# Altium PCB PCB1.PcbDoc
Units mil, origin at the board's own origin, x right, y up, seen from the top; angles counter-clockwise.
Board outline 3210.03 x 2220.03 mil, 2 copper layers (Top Layer, Bottom Layer); 14 components, 6 nets, 33 pads, 0 vias.
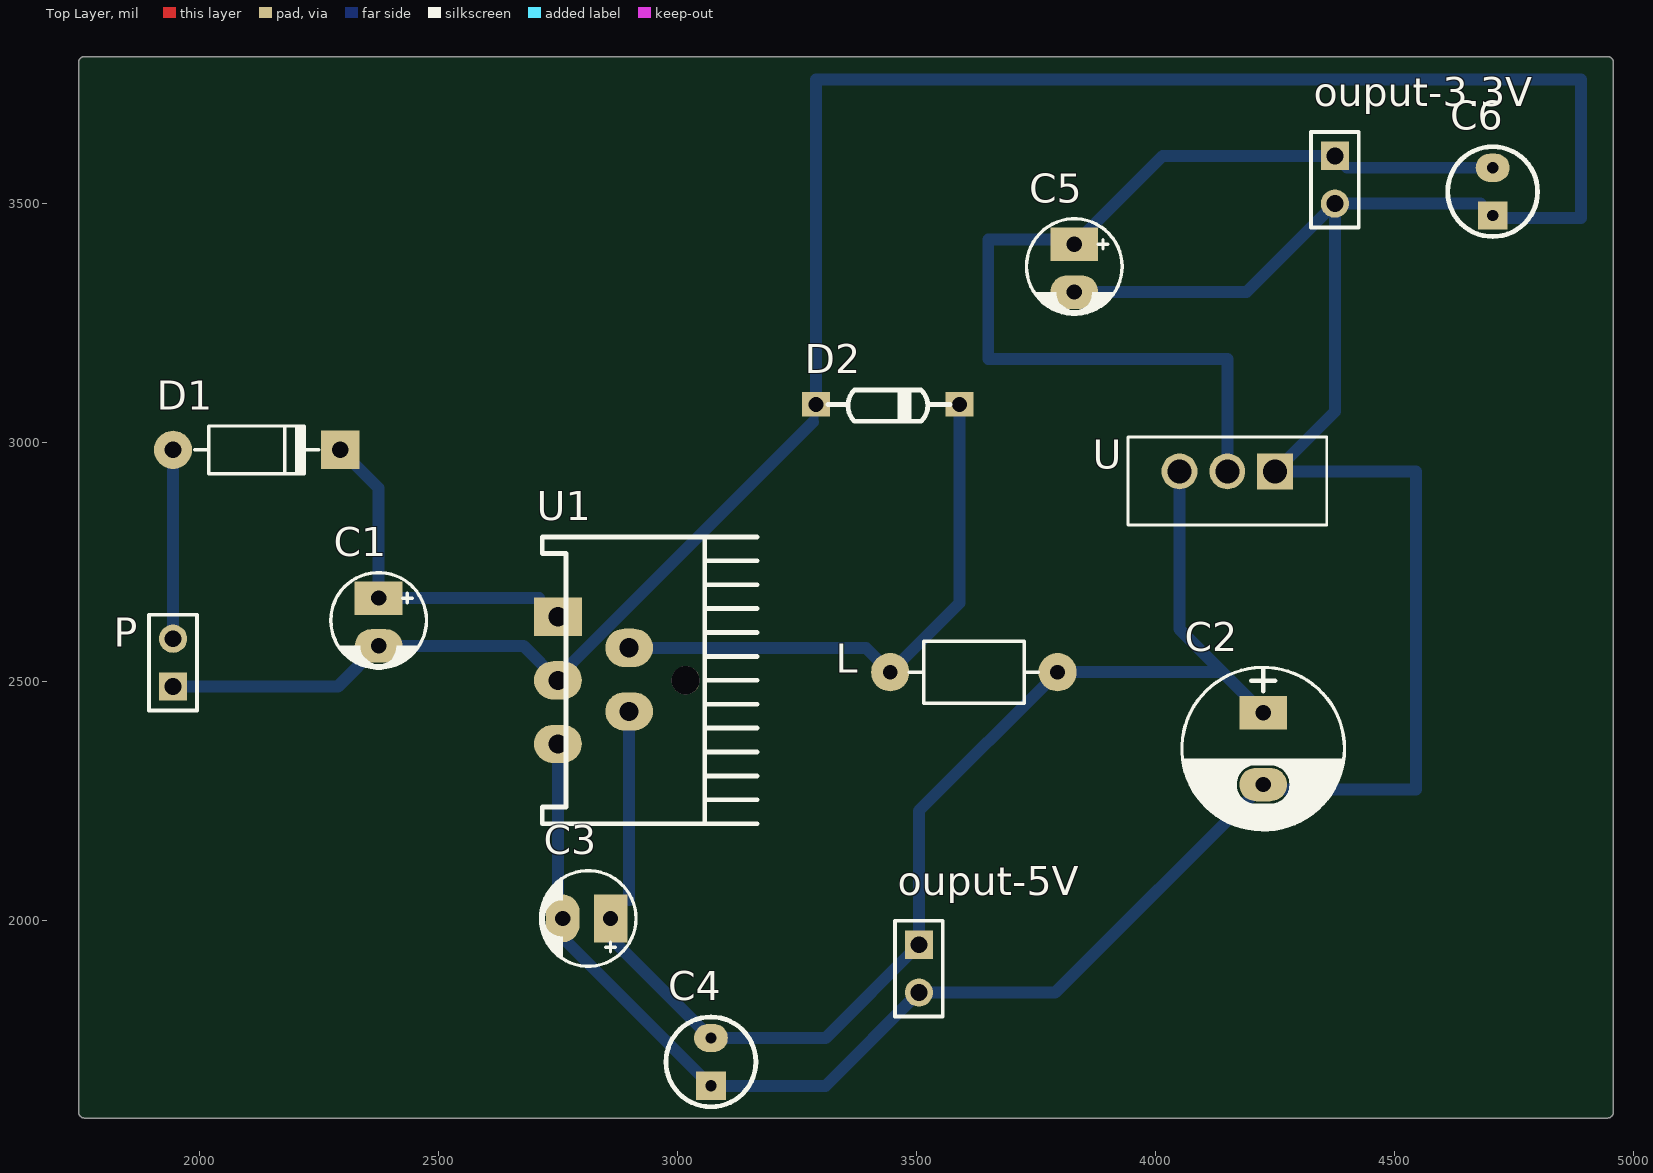
[diagram p0: Top Layer view]
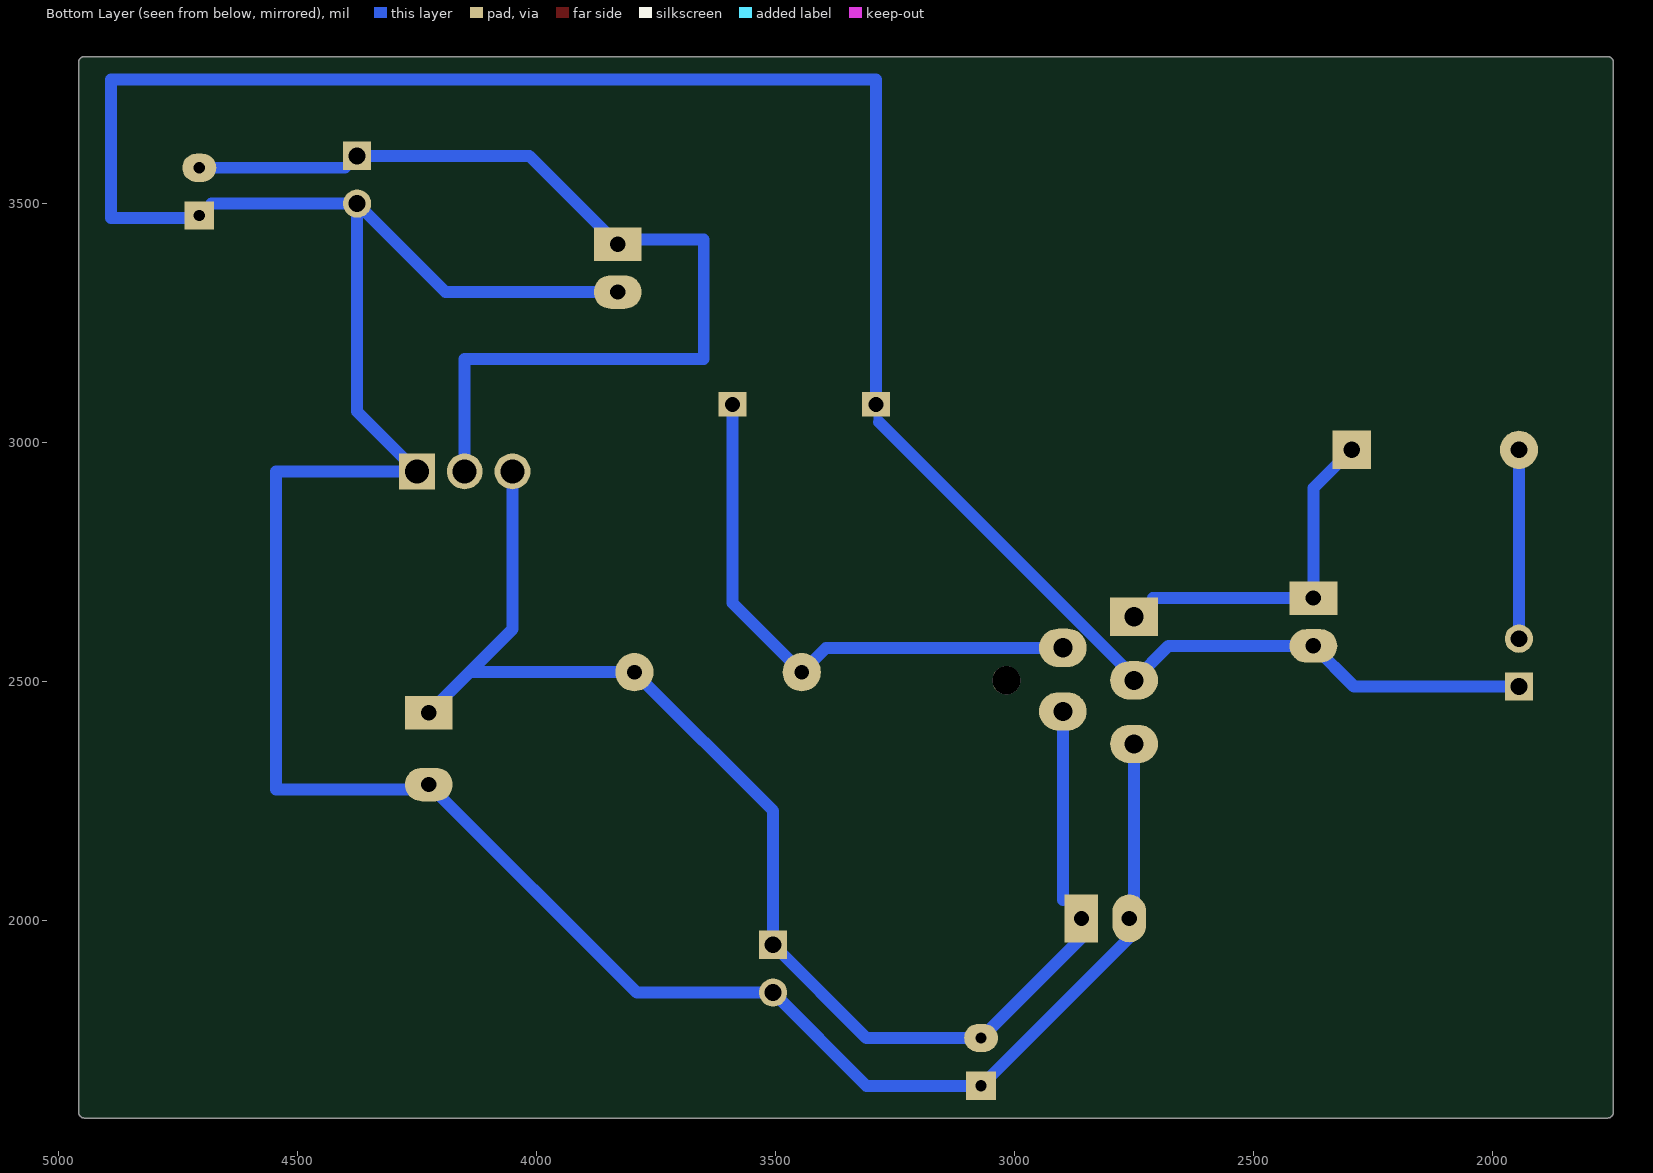
[diagram p1: Bottom Layer view, seen from below]
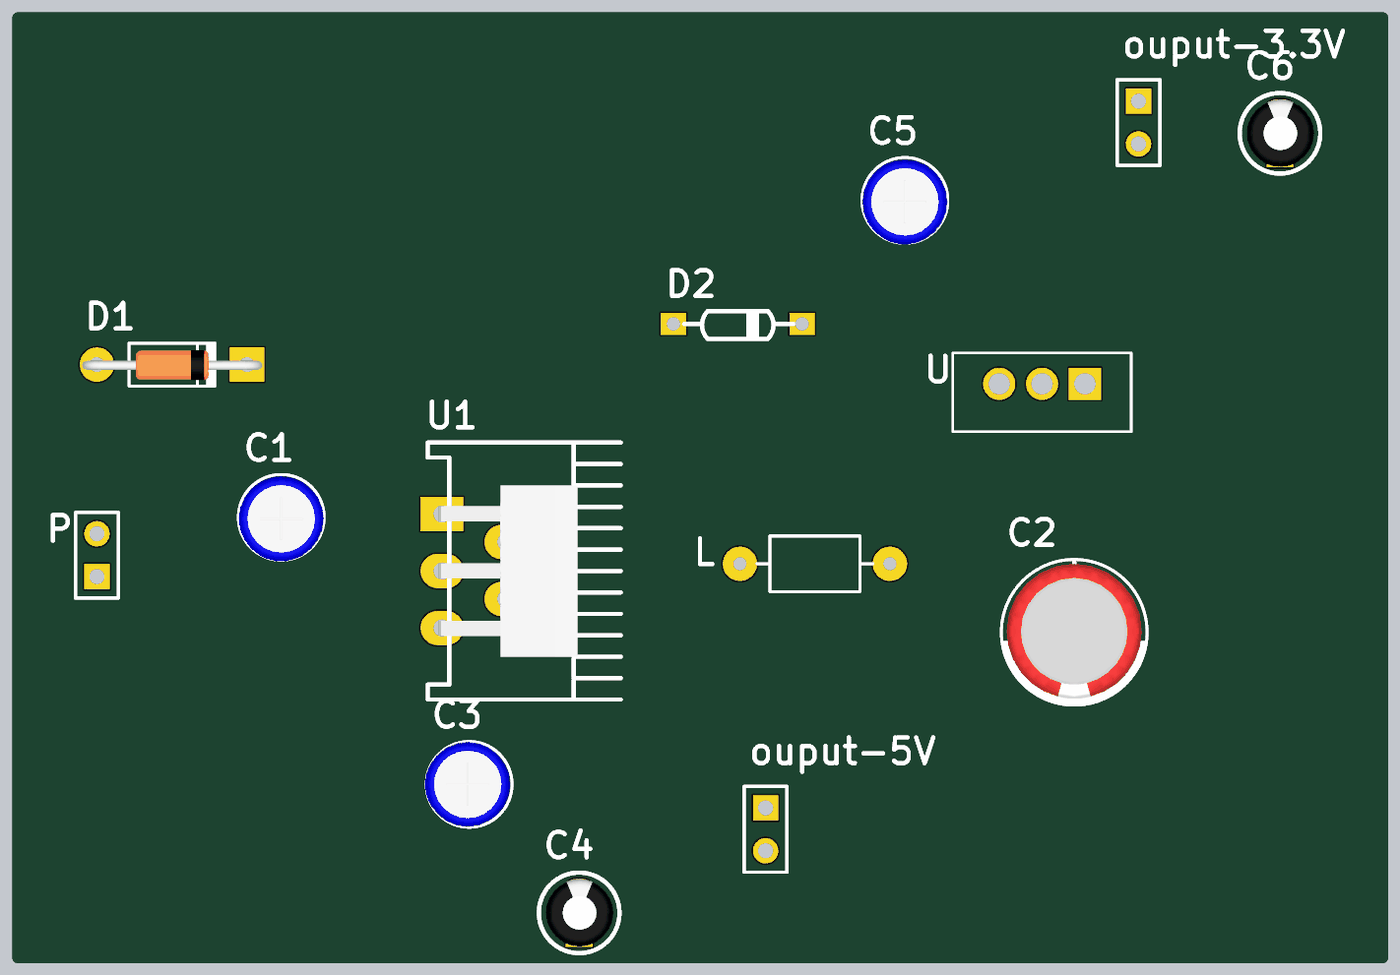
[diagram p2: 3D render of the assembled board from above, using the file's embedded part models]

## Layer stack, top to bottom
Top Solder: solder mask 0.4, Solder Resist, Dk 3.5
Top Layer: signal copper 1.4
Dielectric 1: dielectric 12.6, FR-4, Dk 4.8
Bottom Layer: signal copper 1.4
Bottom Solder: solder mask 0.4, Solder Resist, Dk 3.5

## Board outline
1747.49,1600 1747.48,3795 cw(c1760,3795) 1760,3807.51 4945,3807.51 cw(c4945,3795) 4957.51,3795 4957.52,1600 cw(c4945,1600) 4945,1587.48 1760,1587.48 cw(c1760,1600)

## Design rules (kind name [scope] priority, off if disabled: settings)
Clearance [All] p1: gap=10 ignorepadtopadclearanceinfootprint=FALSE except(0: Arc-Hole Track-Hole SMDPad-Hole THPad-Hole Via-Hole Fill-Hole Poly-Hole Region-Hole Text-Hole)
PolygonConnect [All] p1: connectstyle=Relief reliefconductorwidth=10 reliefentries=4 polygonreliefangle="90 Angle" airgapwidth=10
RoomDefinition Sheet1 [InComponentClass('Sheet1')] p1: confinementstyle=ConfineIn formatcopy=TRUE lockcomponents=FALSE outline 1785,165 5740,165 5740,890 1785,890
RoutingVias [All] p1: holewidth=28 width=50 viastyle="Through Hole" minholewidth=28 minwidth=50 maxholewidth=28 maxwidth=50
SolderMaskExpansion [All] p1: expansion=4
Width [All] p1: maxlimit=10 minlimit=10 preferedwidth=10
30 further rules are at their usual default settings.

## Components (designator, comment, footprint, x,y, rotation, side; value= is the part's Value field where it differs from the comment)
C1 "10uF" CP1/2 2375,2675 r270 top value=10uF/50V
C2 "330uF" CP1.5/3.4 4225,2435 r270 top value=100uF/35V/50V
C3 "10uF" CP1/2 2860,2005 r180 top value=10uF/50V
C4 "" C3MM 3070,1705 r90 top value=0.1uF
C5 "10uF" CP1/2 3830,3415 r270 top value=10uF/50V
C6 "" C3MM 4705,3525 r90 top value=0.1uF
D1 "1N4003" D1A 1945,2985 r180 top value=1N4007
D2 "1N5819" DIODE/NOM/0.5A 3290,3080 r0 top
L "330uH" L/0.4 3795,2520 r180 top value="150 mH"
ouput-3.3V "3.3V" HDR1X2 4375,3600 r270 top
ouput-5V "5V" HDR1X2 3505,1950 r270 top
P "Header 2" HDR1X2 1945,2490 r90 top
U "LM1117T-5.0" TO254P470X1016X2222-3P 4050,2900 r180 top
U1 "LM2576T-5.0" LM2576t 2917,2504 r270 top

## Footprints (in the part's own frame and the unit in brackets; to place one, negate y for a bottom-side part, rotate by r counter-clockwise, add the part's x,y. Pads: shape width x height; smd on the part's side, far side on the other; paste and mask are expansions set on the pad)
C3MM [mm]
  rect 1.5x1.58 hole 0.6: 1(-1.27,0)
  oval 1.5x1.8 hole 0.6: 2(1.27,0)
  silkscreen extent -2.39,-2.39 2.39,2.39, body extent -2,-2.03 1.99,1.97, height 7.01
CP1.5/3.4 [mil] "Tu hoa 220->470uF,16V, 470uF/16V,25V"
  rect 70x100 hole 32: 1(0,0)
  oval 70x100 hole 32: 2(150,0)
  silkscreen extent -95,-170 245,170, body extent -85,-157 230,157, height 446
CP1/2 [mil] "Tu hoa < 22uF/16>50V"
  rect 70x100 hole 32: 1(0,0)
  oval 70x100 hole 32: 2(100,0)
  silkscreen extent -53,-100 146,100, body extent -49,-99 149,99, height 287
D1A [mil] "Diode 1A, W 100mil, L 350mil"
  round 80 hole 35: 1(0,0)
  rect 80x80 hole 35: 2(-350,0)
  silkscreen extent -305,-50 -45,50, body extent -386,-33 34,36, height 84
DIODE/NOM/0.5A [mm]
  rect 1.5x1.3 hole 0.8: 1(0,0) 2(7.62,0)
  silkscreen extent 0.64,-0.89 7.11,0.76
HDR1X2 [mm] "Connector; Header; 2 Position"
  rect 1.5x1.5 hole 0.9: 1(0,0)
  round 1.5 hole 0.9: 2(2.54,0)
  silkscreen extent -1.27,-1.27 3.81,1.27, body extent -1.27,-1.27 3.81,1.27, height 7
L/0.4 [mil] "Inductor , 2 Pin, L 350mil, W 150 mil"
  round 80 hole 31: 1(0,0) 2(350,0)
  silkscreen extent 40,-65 310,65
LM2576t [mil]
  rect 80x100 hole 40: 1(-132,-167.09)
  oval 80x100 hole 40: 2(-67,-18) 3(1,-167) 4(66,-18) 5(134,-167)
  round 59.06 hole 59.06: ""(1,100)
  silkscreen extent -299,-200 301,250, body extent -199,-175 201,150, height 859
TO254P470X1016X2222-3P [mil]
  rect 75x75 hole 50: 1(-200,-40)
  round 75 hole 50: 2(-100,-40) 3(0,-40)
  silkscreen extent -308,-112 108,72

## Part data
C1 C3 C5: library part CP1, "Cap P  0,1uF < 22uF , 16 - 50V", Description 1="10 => 220uF/6,3V/10V - 10uF => 100uF/16V", Description 2="0,1uF => 33uF/50V - 10uF => 22uF/63V", Description 3="0,47uF => 10uF/100V"
C2: library part CP3, "Cap 100uF/35V - 470uF/16V", Description 1="1000uF/6,3V - 470uF/16V - 330uF - 25V", Description 2="220uF/35V - 100uF/50V - 63V - 4,7uF/200V", Description 3="22uF => 33uF100V - 3,3uF => 4,7uF/250V", Description 4="2,2uF =>3,3uF/350 - 2,2uF/400V - 1uF/450V"
C4 C6: library part Cap, "Capacitor", LatestRevisionDate=17-Jul-2002, LatestRevisionNote="Re-released for DXP Platform.", PackageReference=RAD-0.3, Published=8-Jun-2000, Publisher="Altium Limited"
D1: library part D1A, "Diode 1A"
D2: library part "Diode Zener", "Zener Diode", LatestRevisionDate=17-Jul-2002, LatestRevisionNote="Re-released for DXP Platform.", PackageReference=DIODE-0.7, Published=8-Jun-2000, Publisher="Altium Limited"
L: library part L1, "Inductor"
ouput-3.3V ouput-5V: library part "Header 2", "Header, 2-Pin", LatestRevisionDate=17-Jul-2002, LatestRevisionNote="Re-released for DXP Platform.", Publisher="Altium Limited"
P: "Header, 2-Pin", LatestRevisionDate=17-Jul-2002, LatestRevisionNote="Re-released for DXP Platform.", Publisher="Altium Limited"
U: "Linear Voltage Regulator IC 1 Output 800mA TO-220-3", Package=None, Availability=Unavailable, MF="Texas Instruments", MP=LM1117T50, Price=None, SnapEDA_Link=https://www.snapeda.com/parts/LM1117T50/Texas%20Instruments/view-part/53993/?ref=snap
U1: "SIMPLE SWITCHER; 3A Step-Down Voltage Regulator", DigiKeyPartNumber=LM2576T-5.0-ND, Manufacturer="National Semiconductor", PackageTopMarking="NSUZXYTT*LM2576T*-5.0 P+", PowerWise=N, Code_JEDEC=TO-220-AB, ComponentLink1Description="LM2576 Datasheet", ComponentLink1URL=http://www.national.com/ds/LM/LM2576.pdf, ComponentLink2Description="LM2576 Web Page", ComponentLink2URL=http://www.national.com/pf/LM/LM2576.html, ComponentLink3Description="T05A Package Page", ComponentLink3URL=http://www.national.com/packaging/folders/t05a.html, CompType=Switcher, DatasheetVersion=Aug-2004, FirstPublished=4-Dec-2008, PackageDescription="TO-220, Molded, 5 Lead, Straight", PackageReference=T05A, PackageVersion="revJ, Jan-1992", PartNumber=LM2576T-5.0, PinCount=5, Publisher="Altium Limited", RoHS=O

## Nets (pads, with @x,y where several pads share a name; then routed paths per layer and width w, separated by ;. In a path a pad name is that pad's centre, name@x,y a point inside that pad or via, vN(x,y) a via of type N, cw(c..) or ccw(c..) an arc to the next point about the centre after c; other vN are vias at no path point)
GND: C1.2 C2.2 C3.2 C4.1 C5.2 C6.1 D2.1 ouput-3.3V.2 ouput-5V.2 P.1 U1.3 U1.5 U.1 | length 9559.9
  Bottom Layer w10: C3.2@2750,2015 C3.2 C3.2@2760,1965 ; U1.3 U1.3@2750,2509.78 ; U1.3@2758,2495 U1.3@2758,2501.78 ; 3283.22,3043 3290,3043 D2.1 ; C2.2 C2.2@4235,2275 ; C6.1@4680,3500 C6.1 C6.1@4710,3470
  Bottom Layer w25: P.1 2290,2490 C1.2 2678,2575 U1.3 ; C3.2@2750,2015 U1.5 ; U1.3@2750,2509.78 3283.22,3043 ; C3.2@2760,1965 C4.1 3310,1655 ouput-5V.2 3790,1850 C2.2 ; D2.1 3290,3760 4890,3760 4890,3470 C6.1@4710,3470 ; C5.2 4190,3315 ouput-3.3V.2 ; C2.2@4235,2275 4545,2275 4545,2940 U.1 4375,3065 ouput-3.3V.2 ; C6.1@4680,3500 ouput-3.3V.2
NetC1_1: C1.1 D1.2 U1.1 | length 734.2
  Bottom Layer w10: U1.1@2710.91,2675 U1.1
  Bottom Layer w25: D1.2 2375,2905 C1.1 U1.1@2710.91,2675
NetC2_1: C2.1 C3.1 C4.2 L.1 ouput-5V.1 U1.4 U.3 | length 2914.5
  Bottom Layer w10: C3.1@2860,1965 C3.1 2899,2044
  Bottom Layer w25: C3.1@2860,1965 C4.2 3310,1755 ouput-5V.1 3505,2230 L.1 4140,2520 ; 2899,2044 U1.4 ; U.3 4050,2610 4140,2520 ; C2.1 4140,2520
NetC5_1: C5.1 C6.2 ouput-3.3V.1 U.2 | length 2131.1
  Bottom Layer w10: C5.1@3820,3425 C5.1 ; ouput-3.3V.1 ouput-3.3V.1@4400,3575
  Bottom Layer w25: C5.1@3820,3425 3650,3425 3650,3175 4150,3175 U.2 ; C5.1 4015,3600 ouput-3.3V.1 ; ouput-3.3V.1@4400,3575 C6.2
NetD1_1: D1.1 P.2 | length 409.1
  Bottom Layer w10: D1.1@1935,2975 D1.1
  Bottom Layer w25: P.2 D1.1
NetD2_2: D2.2 L.2 U1.2 | length 1187.2
  Bottom Layer w25: U1.2 3394,2571 L.2 3590,2665 D2.2
pads on no net: U1.

## Silkscreen, mask and mechanical layers (free items; w line width, h text height)
Mechanical 1:
  lines w25: 1760,1600 1760,3795 4945,3795 4945,1600 1760,1600